# EAGLE board 0xD_protov1_v19 (EAGLE 9.7.0)
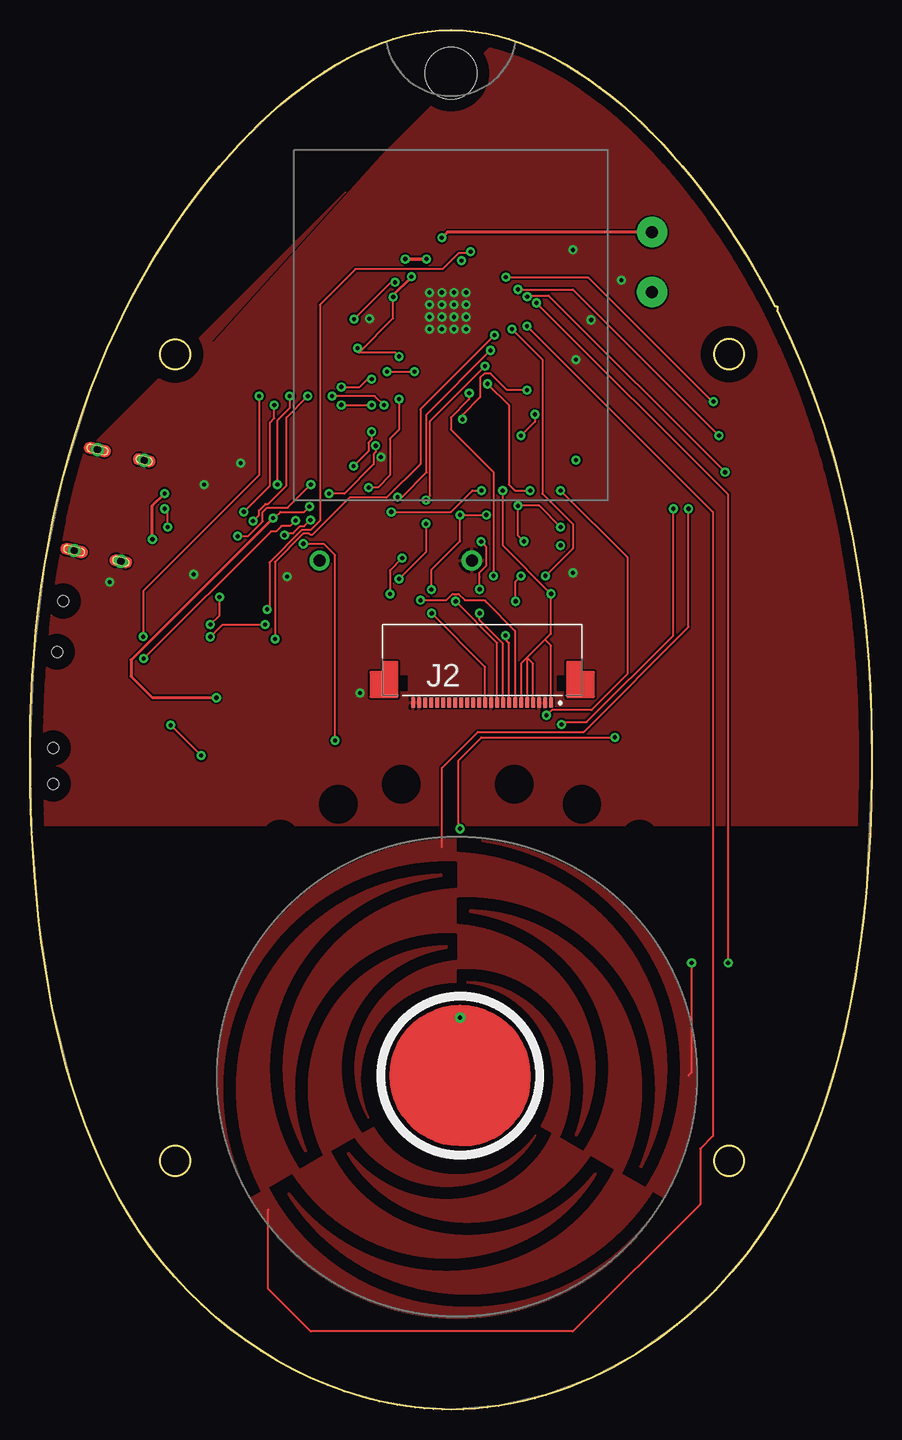
[diagram p0: board, top side]
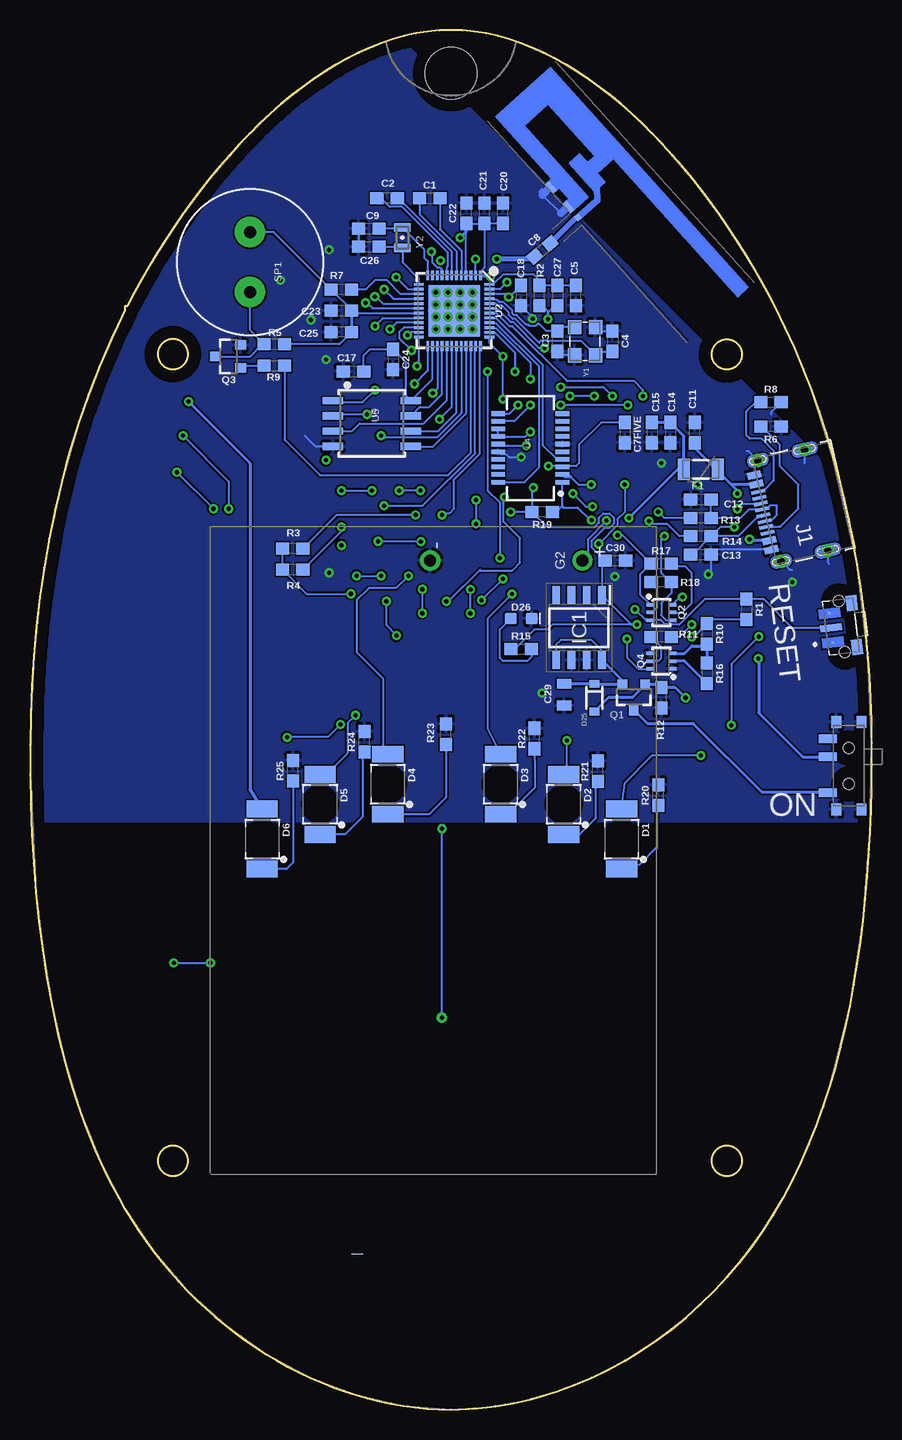
[diagram p1: board, bottom side, seen from below]

Size 70.21 x 115 mm. Coordinates in mm from the lower left corner, seen from the top.
Outline: 62.11,91.96 62.29,91.96 62.29,91.59 62.86,90.44 63.39,89.29 63.91,88.14 64.4,86.97 64.87,85.8 65.31,84.63 65.74,83.45 66.14,82.26 66.52,81.07 66.88,79.88 67.21,78.68 67.53,77.47 68.11,75.06 68.6,72.62 69.03,70.18 69.38,67.73 69.67,65.27 69.89,62.8 70.06,60.33 70.16,57.86 70.21,55.39 70.2,52.92 70.15,50.45 70.05,47.99 69.91,45.55 69.71,43.11 69.47,40.7 69.16,38.31 68.8,35.94 68.37,33.62 67.88,31.32 67.61,30.19 67.32,29.08 67.01,27.97 66.68,26.87 66.34,25.79 65.97,24.72 65.59,23.67 65.18,22.63 64.75,21.61 64.31,20.6 63.84,19.61 63.35,18.63 62.83,17.68 62.29,16.74 61.73,15.81 61.14,14.9 60.53,14.02 59.89,13.15 59.22,12.31 58.53,11.49 57.82,10.69 57.09,9.91 56.34,9.16 55.56,8.43 54.76,7.73 53.95,7.05 53.12,6.4 52.27,5.78 51.4,5.19 50.52,4.62 49.63,4.09 48.72,3.58 47.8,3.11 46.87,2.66 45.93,2.25 44.97,1.87 44.01,1.52 43.04,1.21 42.07,0.93 41.08,0.69 40.1,0.48 39.1,0.31 38.11,0.17 37.11,0.08 36.11,0.02 35.11,0 34.36,0.01 33.61,0.04 32.86,0.1 32.11,0.17 31.36,0.27 30.62,0.39 29.88,0.53 29.14,0.69 28.4,0.86 27.67,1.06 26.21,1.52 24.78,2.05 23.36,2.65 21.97,3.33 20.6,4.07 19.27,4.89 17.97,5.76 16.7,6.7 15.48,7.7 14.29,8.76 13.15,9.88 12.06,11.05 11.02,12.27 10.03,13.54 9.1,14.86 8.23,16.22 7.41,17.63 6.64,19.08 5.92,20.57 5.25,22.09 4.63,23.65 4.05,25.25 3.53,26.88 3.04,28.53 2.6,30.22 2.19,31.93 1.83,33.66 1.5,35.41 1.21,37.19 0.96,38.98 0.74,40.79 0.55,42.61 0.39,44.44 0.25,46.28 0.15,48.13 0.07,49.98 0.02,51.84 0,53.7 0,55.57 0.04,57.43 0.1,59.3 0.2,61.16 0.33,63.02 0.5,64.88 0.7,66.74 0.94,68.6 1.22,70.45 1.54,72.29 1.9,74.13 2.31,75.96 2.76,77.78 3.25,79.59 3.79,81.4 4.38,83.19 5.02,84.97 5.71,86.74 6.46,88.49 7.25,90.23 8.11,91.96 8.7,93.09 9.32,94.21 9.96,95.33 10.62,96.43 11.3,97.51 12.01,98.58 12.73,99.64 13.48,100.67 14.24,101.68 15.02,102.67 15.82,103.64 16.63,104.57 17.46,105.48 18.3,106.36 19.16,107.21 20.03,108.02 20.91,108.8 21.81,109.54 22.71,110.24 23.63,110.9 24.55,111.52 25.48,112.1 26.42,112.62 27.37,113.1 28.32,113.53 29.28,113.91 30.25,114.24 31.21,114.51 32.18,114.72 33.16,114.87 34.13,114.97 35.11,115 36.08,114.97 37.05,114.87 38.03,114.72 39,114.51 39.96,114.24 40.93,113.91 41.89,113.53 42.84,113.1 43.79,112.62 44.73,112.1 45.66,111.52 46.58,110.9 47.5,110.24 48.4,109.54 49.3,108.8 50.18,108.02 51.05,107.21 51.91,106.36 52.75,105.48 53.58,104.57 54.39,103.64 55.19,102.67 55.97,101.68 56.73,100.67 57.48,99.64 58.2,98.58 58.91,97.51 59.59,96.43 60.25,95.33 60.89,94.21 61.51,93.09 62.11,91.96
Outline: circle at 12.11,20.74 radius 1.25
Outline: circle at 12.11,87.96 radius 1.25
Outline: circle at 58.29,20.74 radius 1.25
Outline: circle at 58.29,87.98 radius 1.25
Copper layers (1*16): Top 0.035mm / dielectric 1.5mm / Bottom 0.035mm
Design rules "Fusion Electronics Design Rules": minimum track width 6mil, minimum drill 0.35mm, track to track 6mil, track to pad 6mil, pad to pad 6mil, via to via 6mil, smd to smd 6mil, copper to edge 40mil, drill to drill 6mil, minimum pad ring 10mil, minimum via ring 8mil, stop-mask expansion 4mil, vias tented up to drill 0mil, thermal gap 10mil
Holes 4.32 mm at 35.11,111.41

## Footprints (pad centres in the part's own frame; a part is rotated, then mirrored left to right if it is on the bottom)
BUTTON_PASSIVE_12MM = drill 0.356: BUTTON 0,4.826
0603 = smd 1.1 x 1: 1 -0.85,0; 2 0.85,0
0805 = smd 0.8 x 1.2: 1 -0.9,0; 2 0.9,0
XZ-PLCC2-REV-HOLE = smd 1.4 x 2.6: ANODE -2.5,0; CATHODE 2.5,0
SOD-323 = smd 0.63 x 0.83: A 1.15,0; C -1.15,0
LED-0603@1 = smd 1 x 1: A 0,-0.877; C 0,0.877
TRACE_ANTENNA_2.4GHZ_25.7MM_TUNED = smd 0.46 x 0.46: ANT 0,0.23 | smd 1 x 0.46: GND -1.18,0.23; GND2 -3.38,0.23
PTC-1206 = smd 1 x 1.8: 1 -1.4,0; 2 1.4,0
KEYSTONE_2479 = drill 1 pad 1.676: + 51.15,6.15; - 51.15,18.85
SOIC127P600X170-8N = smd 1.5 x 0.65: 1 -2.7,1.905; 2 -2.7,0.635; 3 -2.7,-0.635; 4 -2.7,-1.905; 5 2.7,-1.905; 6 2.7,-0.635; 7 2.7,0.635; 8 2.7,1.905
MOLEX_2171790001 = smd 0.59 x 1.15: A1B12 -3.2,3.425; A4B9 -2.4,3.425; B1A12 3.2,3.425; B4A9 2.4,3.425 | smd 0.298 x 1.15: A5 -1.25,3.425; A6 -0.25,3.425; A7 0.25,3.425; A8 1.25,3.425; B5 1.75,3.425; B6 0.75,3.425; B7 -0.75,3.425; B8 -1.75,3.425 | drill 0.6 pad 1: SH1 -4.32,-1.15; SH2 4.32,-1.15; SH3 -4.32,2.85; SH4 4.32,2.85
MOLEX_52435-2471 = smd 0.3 x 0.8: 1 -5.75,0; 2 -5.25,0; 3 -4.75,0; 4 -4.25,0; 5 -3.75,0; 6 -3.25,0; 7 -2.75,0; 8 -2.25,0; 9 -1.75,0; 10 -1.25,0; 11 -0.75,0; 12 -0.25,0; 13 0.25,0; 14 0.75,0; 15 1.25,0; 16 1.75,0; 17 2.25,0; 18 2.75,0; 19 3.25,0; 20 3.75,0; 21 4.25,0; 22 4.75,0; 23 5.25,0; 24 5.75,0
CUS-12_SPDT = smd 0.7 x 1.5: P$1 -2.25,1.75; P$2 0.75,1.75; P$3 2.25,1.75 | smd 1 x 0.8: P$4 -3.65,1.05; P$5 -3.65,-1.05; P$6 3.65,1.05; P$7 3.65,-1.05 | hole 0.9: -1.5,0; 1.5,0
SOT23-3@1 = smd 0.8 x 0.9: 1 -0.95,-1; 2 0.95,-1; 3 0,1.1
SC70-6 = smd 0.3 x 0.66: 1 -0.65,-0.92; 2 0,-0.92; 3 0.65,-0.92; 4 0.65,0.92; 5 0,0.92; 6 -0.65,0.92
SOT23-3 = smd 0.8 x 0.9: 1 -0.95,-1; 2 0.95,-1; 3 0,1.1
SW_TL3340AF160QG = smd 0.2 x 0.2: 1 -1.225,0.9; 3 1.225,0.9 | smd 0.6 x 1.8: 2 0,0.9 | smd 1.3 x 0.9: S1 -1.85,-1.05; S2 1.85,-1.05 | hole 0.9: 2.125,0; -2.125,0
PS12 = drill 1 pad 2.54: P$1 -2.5,0; P$2 2.5,0
QFN48-0.4MM = smd 0.8 x 0.23: 1 -2.95,2.2; 2 -2.95,1.8; 3 -2.95,1.4; 4 -2.95,1; 5 -2.95,0.6; 6 -2.95,0.2; 7 -2.95,-0.2; 8 -2.95,-0.6; 9 -2.95,-1; 10 -2.95,-1.4; 11 -2.95,-1.8; 12 -2.95,-2.2; 25 2.95,-2.2; 26 2.95,-1.8; 27 2.95,-1.4; 28 2.95,-1; 29 2.95,-0.6; 30 2.95,-0.2; 31 2.95,0.2; 32 2.95,0.6; 33 2.95,1; 34 2.95,1.4; 35 2.95,1.8; 36 2.95,2.2 | smd 0.23 x 0.8: 13 -2.2,-2.95; 14 -1.8,-2.95; 15 -1.4,-2.95; 16 -1,-2.95; 17 -0.6,-2.95; 18 -0.2,-2.95; 19 0.2,-2.95; 20 0.6,-2.95; 21 1,-2.95; 22 1.4,-2.95; 23 1.8,-2.95; 24 2.2,-2.95; 37 2.2,2.95; 38 1.8,2.95; 39 1.4,2.95; 40 1,2.95; 41 0.6,2.95; 42 0.2,2.95; 43 -0.2,2.95; 44 -0.6,2.95; 45 -1,2.95; 46 -1.4,2.95; 47 -1.8,2.95; 48 -2.2,2.95 | smd 4.3 x 4.3: EP 0,0
SSOP20_L = smd 0.381 x 1.143: 1 -2.857,-2.68; 2 -2.223,-2.68; 3 -1.587,-2.68; 4 -0.953,-2.68; 5 -0.318,-2.68; 6 0.318,-2.68; 7 0.953,-2.68; 8 1.587,-2.68; 9 2.223,-2.68; 10 2.857,-2.68; 11 2.857,2.68; 12 2.223,2.68; 13 1.587,2.68; 14 0.953,2.68; 15 0.318,2.68; 16 -0.318,2.68; 17 -0.953,2.68; 18 -1.587,2.68; 19 -2.223,2.68; 20 -2.857,2.68
SOIC-8 = smd 0.61 x 1.702: 1 -1.905,-3.251; 2 -0.635,-3.251; 3 0.635,-3.251; 4 1.905,-3.251; 5 1.905,3.251; 6 0.635,3.251; 7 -0.635,3.251; 8 -1.905,3.251
CRYSTAL-SMD-3.2X2.5 = smd 1.2 x 1.1: 1 -1.175,-0.875; 2 1.175,-0.875; 3 1.175,0.875; 4 -1.175,0.875
FC-12M = smd 0.7 x 1.4: 1 -0.85,0; 2 0.85,0

## Placement (x,y rotation side)
B1  [BUTTON_PASSIVE_12MM]  35.86,27.84 0 top
C1  270pF  [0603]  36.88,100.99 0 bottom
C2  270pF  [0603]  40.43,100.99 180 bottom
C3  10pF  [0603]  26.21,89.05 90 bottom
C4  10pF  [0603]  21.64,89.05 270 bottom
C5  10nF  [0603]  24.69,92.86 90 bottom
C7FIVE  0.1uF  [0603]  20.62,81.43 270 bottom
C8  5.6pF  [0603]  27.48,96.67 40 bottom
C9  15pF  [0603]  41.96,98.45 0 bottom
C11  0.1uF  [0603]  14.78,81.43 90 bottom
C12  47pF  [0603]  14.27,75.85 180 bottom
C13  47pF  [0603]  14.27,71.27 0 bottom
C14  0.1uF  [0603]  16.81,81.43 270 bottom
C15  4.7uF  [0603]  18.34,81.43 270 bottom
C17  0.1uF  [0603]  43.23,86.51 180 bottom
C18  100pF  [0603]  29.26,92.86 270 bottom
C20  0.1uF  [0603]  30.78,99.72 90 bottom
C21  0.1uF  [0603]  32.31,99.72 90 bottom
C22  10uF  [0603]  33.83,99.72 90 bottom
C23  0.1uF  [0603]  44.24,91.59 180 bottom
C24  1.0uF  [0603]  39.93,87.53 270 bottom
C25  0.1uF  [0603]  44.24,89.82 180 bottom
C26  15pF  [0603]  41.96,96.93 0 bottom
C27  3.0nF  [0603]  26.21,92.86 270 bottom
C29  1.0uF  [0805]  25.67,59.59 270 bottom
C30  2.2uF  [0603]  21.4,70.77 0 bottom
D1  XZDGK45WT-9-GREEN-REV  [XZ-PLCC2-REV-HOLE]  20.88,47.55 270 bottom
D2  XZDGK45WT-9-GREEN-REV  [XZ-PLCC2-REV-HOLE]  25.7,50.45 270 bottom
D3  XZDGK45WT-9-GREEN-REV  [XZ-PLCC2-REV-HOLE]  30.96,52.12 270 bottom
D4  XZDGK45WT-9-GREEN-REV  [XZ-PLCC2-REV-HOLE]  40.38,52.12 270 bottom
D5  XZDGK45WT-9-GREEN-REV  [XZ-PLCC2-REV-HOLE]  46.02,50.45 270 bottom
D6  XZDGK45WT-9-GREEN-REV  [XZ-PLCC2-REV-HOLE]  50.85,47.55 270 bottom
D25  BAT20J  [SOD-323]  23.15,59.34 270 bottom
D26  RED  [LED-0603@1]  29.26,65.94 270 bottom
E1  ANTENNA  [TRACE_ANTENNA_2.4GHZ_25.7MM_TUNED]  24.69,99.21 312 bottom
F1  500mA  [PTC-1206]  14.27,78.39 180 bottom
G2  KEYSTONE_2479  [KEYSTONE_2479]  17.98,19.62 90 bottom
IC1  AP2112M-3.3TRG1  [SOIC127P600X170-8N]  24.43,65.18 270 bottom
J1  2171790001  [MOLEX_2171790001]  5.77,75.56 103 bottom
J2  52435-2471  [MOLEX_52435-2471]  37.7,58.94 180 top
ON  CUS-12B  [CUS-12_SPDT]  1.93,53.66 90 bottom
Q1  2.5A/30V  [SOT23-3@1]  19.86,59.42 180 bottom
Q2  MBT3904DW1T1  [SC70-6]  17.57,66.45 270 bottom
Q3  600mA/40V  [SOT23-3]  53.64,87.78 90 bottom
Q4  MBT3904DW1T1  [SC70-6]  17.57,62.38 90 bottom
R1  10k  [0603]  10.46,66.7 270 bottom
R2  20k  [0603]  27.73,92.86 90 bottom
R3  10k  [0603]  48.31,71.78 180 bottom
R4  10k  [0603]  48.31,70 180 bottom
R5  1k  [0603]  49.83,88.8 180 bottom
R6  5.1k  [0603]  8.43,81.94 180 bottom
R7  10k  [0603]  44.24,93.37 180 bottom
R8  5.1k  [0603]  8.43,83.97 0 bottom
R9  1k  [0603]  49.83,87.02 0 bottom
R10  10k  [0603]  13.76,64.67 270 bottom
R11  1k  [0603]  17.57,64.42 180 bottom
R12  10k  [0603]  17.57,59.34 90 bottom
R13  27  [0603]  14.27,74.32 180 bottom
R14  27  [0603]  14.27,72.8 180 bottom
R15  1K  [0603]  29.26,63.4 0 bottom
R16  1k  [0603]  13.76,61.37 270 bottom
R17  10k  [0603]  17.57,70.51 0 bottom
R18  10k  [0603]  17.57,68.99 180 bottom
R19  10k  [0603]  27.5,74.83 180 bottom
R20  330  [0603]  17.83,51.21 90 bottom
R21  330  [0603]  22.87,53.21 90 bottom
R22  330  [0603]  28.13,55.94 90 bottom
R23  330  [0603]  35.54,56.29 90 bottom
R24  330  [0603]  42.33,55.66 90 bottom
R25  330  [0603]  48.28,53.25 90 bottom
RESET  TL3340AF160QG  [SW_TL3340AF160QG]  2.51,65.27 97 bottom
SP1  SPEAKER/PS12  [PS12]  51.86,95.66 270 bottom
U2  ESP3212  [QFN48-0.4MM]  34.85,91.59 270 bottom
U4  FT231XS  [SSOP20_L]  28.5,80.16 90 bottom
U5  W25Q32FVSS  [SOIC-8]  41.7,82.2 270 bottom
Y1  26MHz  [CRYSTAL-SMD-3.2X2.5]  23.92,89.05 270 bottom
Y2  32.768kHz  [FC-12M]  39.16,97.69 270 bottom

## Library data of the parts
B1 = PatternAgents-TouchWidgets
C1 C2 = esp32-thing-temp; PROD_ID: CAP-13339
C3 C4 = SparkFun-Capacitors; PROD_ID: CAP-11812
C5 = SparkFun-Capacitors; PROD_ID: CAP-00867
C7FIVE C11 C14 C15 C17 C20 C21 C23 C25 = SparkFun-Capacitors; PROD_ID: CAP-00810
C8 = esp32-thing-temp; PROD_ID: CAP-12456
C9 C26 = SparkFun-Capacitors; PROD_ID: CAP-07881
C12 C13 = SparkFun-Capacitors; PROD_ID: CAP-08913
C18 = SparkFun-Capacitors; PROD_ID: CAP-07883
C22 = SparkFun-Capacitors; PROD_ID: CAP-11015
C24 = SparkFun-Capacitors; PROD_ID: CAP-00868
C27 = esp32-thing-temp; PROD_ID: CAP-13515
C29 = SparkFun-Capacitors; PROD_ID: CAP-11625
C30 = SparkFun-Capacitors; PROD_ID: CAP-07888
D1-D6 = PatternAgents-SunLED
D25 = SparkFun-DiscreteSemi; PROD_ID: DIO-11623
D26 = SparkFun-LED; PROD_ID: DIO-00819
E1 = esp32-thing-temp
F1 = SparkFun-PowerIC; PROD_ID: RES-11150
G2 = keystone
IC1 = AP2112M-3.3TRG1; ARROW_PART_NUMBER: AP2112M-3.3TRG1; ARROW_PRICE-STOCK: https://www.arrow.com/en/products/ap2112m-3.3trg1/diodes-incorporated?region=nac; DESCRIPTION: LDO Voltage Regulators LDO CMOS HiCurr; HEIGHT: 1.7mm; MANUFACTURER_NAME: Diodes Inc.; MANUFACTURER_PART_NUMBER: AP2112M-3.3TRG1; MOUSER_PART_NUMBER: 621-AP2112M-3.3TRG1; MOUSER_PRICE-STOCK: https://www.mouser.co.uk/ProductDetail/Diodes-Incorporated/AP2112M-33TRG1?qs=5V6w%252Be2aIqa1YM8VADFBsQ%3D%3D
J1 = 2171790001 - Molex USB C Female Connector; AVAILABILITY: In Stock; CHECK_PRICES: https://www.snapeda.com/parts/2171790001/Molex/view-part/?ref=eda; DESCRIPTION: Universal Serial Bus (USB) Shielded I/O Receptacle, Type C, Right-Angle, Surface Mount, Top Mount, Single Row, 16 Circuits, Gold (Au) Plating; MF: Molex; MP: 2171790001; PACKAGE: None; PRICE: None; SNAPEDA_LINK: https://www.snapeda.com/parts/2171790001/Molex/view-part/?ref=snap
J2 = 52435-2471; AVAILABILITY: In Stock; CHECK_PRICES: https://www.snapeda.com/parts/52435-2471/Molex/view-part/?ref=eda; DESCRIPTION: 52435 Series 0.5mm Pitch 24 Way Right Angle FPC Connector, ZIF Top Contact | Molex Incorporated 52435-2471; MF: Molex; MP: 52435-2471; PACKAGE: None; PRICE: None; SNAPEDA_LINK: https://www.snapeda.com/parts/52435-2471/Molex/view-part/?ref=snap
ON = IDEO-Switches
Q1 = SparkFun-DiscreteSemi; PROD_ID: TRANS-11308
Q2 Q4 = esp32-thing-temp; PROD_ID: TRANS-13337
Q3 = SparkFun-DiscreteSemi; PROD_ID: TRANS-08049
R1 R3-R12 R16-R25 = SparkFun-Resistors; PROD_ID: RES-00824
R2 = SparkFun-Resistors; PROD_ID: RES-09383
R13 R14 = SparkFun-Resistors; PROD_ID: RES-09334
R15 = SparkFun-Resistors; PROD_ID: RES-07856
RESET = TL3340AF160QG; AVAILABILITY: In Stock; DESCRIPTION: Tactile Switch SPST-NO Side Actuated Surface Mount, Right Angle; MF: E-Switch; MP: TL3340AF160QG; PACKAGE: None; PRICE: None; PURCHASE-URL: https://pricing.snapeda.com/search/part/TL3340AF160QG/?ref=eda
SP1 = adafruit
U2 = esp32-thing-temp; PROD_ID: IC-13338
U4 = SparkFun-DigitalIC; PROD_ID: IC-11524
U5 = SparkFun-DigitalIC; PROD_ID: IC-13229
Y1 = things; PROD_ID: XTAL-12454
Y2 = crystal

## Nets
3.3V: C18.1 C20.1 C21.1 C22.1 C23.1 C25.1 C30.1 IC1.1 J2.1 J2.4 J2.5 J2.6 R1.2 R3.2 R4.2 R5.1 R7.2 R10.1 R15.1 R19.2 SP1.P$1 U2.1 U2.3 U2.4 U2.19 U2.37 U2.43 U2.46
3.3V_F: C7FIVE.1 U4.3 U4.13 U4.14
26M_N: C4.2 U2.44 Y1.3
26M_P: C3.2 U2.45 Y1.1
32K_XN: C26.2 U2.13 Y2.2
32K_XP: C9.2 U2.12 Y2.1
36: C1.2 U2.5
37: C1.1 U2.6
38: C2.1 U2.7
39: C2.2 U2.8
BUZZER_OUT: R9.2 U2.34
CAP_10N: C5.2 C27.1 R2.2 U2.48
CHIP_PU: Q2.3 R1.1 RESET.2 U2.9
D+: C13.1 J1.A6 J1.B6 R14.1
D-: C12.1 J1.A7 J1.B7 R13.1
DST: R7.1 U2.15
DTR: Q2.1 R17.1 R19.1 U4.1
FLASH_SCK: U2.31 U5.6
FLASH_SCS: U2.30 U5.1
FLASH_SDI: U2.33 U5.5
FLASH_SDO: U2.32 U5.2
FLASH_SHD: U2.28 U5.7
FLASH_SWP: U2.29 U5.3
FLASH_VDD: C17.1 C24.1 U2.26 U5.8
GND: C3.1 C4.1 C5.1 C7FIVE.2 C9.1 C11.2 C12.2 C13.2 C14.2 C15.2 C17.2 C18.2 C20.2 C21.2 C22.2 C23.2 C24.2 C25.2 C26.1 C29.2 C30.2 D26.C E1.GND E1.GND2 G2.- IC1.6 IC1.7 J1.A1B12 J1.B1A12 J1.SH1 J1.SH2 J1.SH3 J1.SH4 J2.2 J2.3 J2.11 J2.23 J2.24 ON.P$4 ON.P$5 ON.P$6 ON.P$7 Q3.2 Q4.1 Q4.4 R6.1 R8.2 R12.1 R20.2 R21.2 R22.2 R23.2 R24.2 R25.2 RESET.1 RESET.3 U2.EP U4.6 U4.16 U5.4 Y1.2 Y1.4
GPIO-0: Q4.6 U2.23
LCD_CLK: J2.9 R4.1 U2.35
LCD_CS: J2.8 U2.21
LCD_DC: J2.10 U2.22
LCD_RST: J2.7 U2.24
LCD_SDATA: J2.12 R3.1 U2.36
LED1: D1.ANODE U2.42
LED2: D2.ANODE U2.39
LED3: D3.ANODE U2.38
LED4: D4.ANODE U2.27
LED5: D5.ANODE U2.25
LED6: D6.ANODE U2.14
LNA_IN: C8.1 U2.2
N$1: D1.CATHODE R20.1
N$2: D2.CATHODE R21.1
N$3: Q3.3 R5.2 SP1.P$2
N$4: C27.2 R2.1 U2.47
N$5: J1.A5 R6.2
N$6: D3.CATHODE R22.1
N$7: R13.2 U4.12
N$8: R14.2 U4.11
N$9: Q4.2 R16.2
N$10: Q2.5 R17.2
N$11: J1.B5 R8.1
N$12: Q2.2 R18.2
N$13: Q4.3 R10.2 R16.1
N$14: Q4.5 R11.2
N$15: Q2.6 R11.1
N$16: G2.+ ON.P$2
N$17: D4.CATHODE R23.1
N$18: D26.A R15.2
N$19: D5.CATHODE R24.1
N$20: D6.CATHODE R25.1
N$26: Q3.1 R9.1
RTS: Q2.4 R18.1 U4.2
T_Q1: U2.20
T_Q2: U2.18
T_Q3: U2.17
T_Q4: B1.BUTTON U2.16
TRACE_ANT: C8.2 E1.ANT
U0RXD: U2.40 U4.20
U0TXD: U2.41 U4.4
V_BATT: ON.P$1 Q1.3
V_USB: C14.1 C15.1 D25.A F1.2 Q1.1 R12.2 U4.15
VIN: C29.1 D25.C IC1.5 IC1.8 Q1.2
VUSB-RAW: C11.1 F1.1 J1.A4B9 J1.B4A9

## Tracks (layer width: path | path; a pad name or v marks a point on that pad's centre or on a via)
3.3V  (via drill 0.35)
  Top 0.152: v30.78,87.78 30.47,88.1 27.42,88.1 | v19.61,65.43 16.05,65.43 v15.03,64.42 | 42.95,64.17 43.45,64.67 v43.45,68 39.42,72.04 v39.42,76.61 | 27.42,88.1 27.42,88.39 v27.32,88.49 | 27.42,88.1 30.29,90.97 v30.29,92.74 | v30.78,84.23 30.78,81.69 30.02,80.93 30.02,77.88 29,76.86 v28.24,76.86 | v37.64,76.61 36.88,76.61 35.1,74.83 v30.12,74.83 | J2.1 43.45,63.67 42.95,64.17 | 42.95,64.17 41.45,62.67 | 41.45,62.67 J2.5 | J2.6 40.95,62.17 41.45,62.67 | J2.4 41.95,62.17 41.45,62.67
  Top 0.254: SP1.P$1 34.81,98.16 v34.34,97.69 | v30.29,92.74 30.29,92.88 31.8,94.39 v31.8,94.44
  Bottom 0.152: C21.1 32.31,95.17 32.65,94.83 U2.1 32.54,94.44 v31.8,94.44 | C20.1 C21.1 | C21.1 C22.1 33.85,98.86 33.85,98.71 U2.4 U2.3 | 43.48,89.9 C25.1 44.41,88.8 R5.1 | U2.19 43.19,91.39 C23.1 43.39,91.67 R7.2 49.88,98.16 SP1.P$1 | 29.98,92.99 U2.46 | C18.1 29.98,92.99 | R1.2 13.43,65.85 R10.1 14.87,64.42 v15.03,64.42 | U2.43 31.84,91.74 31.4,91.74 31.36,91.7 31.18,91.7 30.1,90.63 29.89,90.63 27.75,88.49 v27.32,88.49 | U2.37 31.9,88.9 v30.78,87.78 v30.78,84.23 | R3.2 R4.2 47.15,68 v43.45,68 | 29.98,92.99 30.23,92.74 v30.29,92.74 | v28.24,76.86 28.35,76.76 R19.2 | v37.64,76.61 v39.42,76.61 | R19.2 v30.12,74.83 | R19.2 27.06,73.54 23.13,73.54 22.75,73.92 22.75,74.35 22.4,74.7 21.89,74.7 21.54,74.35 21.54,73.85 21.89,73.49 22.32,73.49 23.4,72.41 23.4,71.91 C30.1 22.53,70.49 IC1.1 20.08,65.43 v19.61,65.43 26.65,65.43 27.05,65.03 28.15,65.03 29.78,63.4 R15.1
  Bottom 0.254: C23.1 43.39,89.99 43.48,89.9 | v34.34,97.69 33.85,98.18 33.85,98.71
3.3V_F  (via drill 0.35)
  Top 0.152: v28.5,81.5 28.5,80.86 28.22,80.59 28.22,79.89 v26.97,78.64
  Bottom 0.152: C7FIVE.1 22.57,82.28 24.43,80.42 24.43,78.89 24.69,78.64 25.75,78.64 U4.3 25.88,78.64 v26.97,78.64 | U4.13 U4.14 28.88,81.12 v28.5,81.5
26M_N
  Bottom 0.152: C4.2 22.72,88.2 Y1.3 24.22,89.05 27.03,89.05 27.07,89.09 27.57,89.09 27.75,88.92 29.76,90.93 29.98,90.93 30.29,91.24 30.29,91.46 30.84,92 31.2,92 31.2,92.01 31.38,92.19 U2.44
26M_P
  Bottom 0.152: Y1.1 25.88,90.23 C3.2 27.14,89.9 27.77,90.54 27.83,90.54 28.05,90.33 28.55,90.33 28.65,90.42 28.8,90.42 28.92,90.54 28.94,90.54 29.64,91.23 29.85,91.23 29.99,91.37 29.99,91.58 30.71,92.31 31.06,92.31 31.26,92.5 31.36,92.5 31.4,92.54 31.84,92.54 U2.45
32K_XN
  Bottom 0.152: U2.13 37.8,94.29 39.16,95.66 Y2.2 39.25,96.93 C26.2
32K_XP
  Bottom 0.152: 39.12,98.5 Y2.1 | C9.2 39.16,98.45 39.12,98.5 | U2.12 37.05,95.73 37.35,96.04 37.35,96.73 39.12,98.5
36
  Bottom 0.152: C1.2 36.03,98.39 34.25,96.6 U2.5
37
  Bottom 0.152: C1.1 37.73,99.66 34.65,96.57 U2.6
38
  Bottom 0.152: C2.1 39.49,100.99 35.05,96.54 U2.7
39
  Bottom 0.152: U2.8 35.45,95.23 35.36,95.31 35.36,96.43 39.2,100.26 40.23,100.26 40.96,100.99 C2.2
BUZZER_OUT
  Bottom 0.152: U2.34 33.45,79.79 35.35,77.88 46.02,77.88 48.98,80.84 R9.2
CAP_10N
  Bottom 0.152: R2.2 27.73,93.76 | R2.2 C27.1 C5.2 | R2.2 27.73,94.13 28.24,94.64 30.74,94.64 31.58,93.79 U2.48
CHIP_PU  (via drill 0.35)
  Top 0.152: v19.76,66.7 19.96,66.9 19.96,70.62 22.66,73.32 23.41,73.32 24.18,74.09 24.18,92.1 27.14,95.06 34.4,95.06 35.72,96.39 36.62,96.39 v36.75,96.52
  Bottom 0.152: RESET.2 6.64,65.16 9.03,67.55 R1.1 13.93,67.55 16.06,65.42 17.23,65.42 17.61,65.8 Q2.3 18.86,65.8 v19.76,66.7 | v36.75,96.52 36.67,96.44 36.67,95.62 36.22,95.17 36.04,95.17 35.85,94.98 U2.9
D+  (via drill 0.35)
  Top 0.152: v11.22,75.08 11.48,74.83 v11.48,73.56
  Bottom 0.152: J1.A6 9.22,74.38 9.57,74.38 11.15,72.8 R14.1 | v11.22,75.08 10.82,75.49 9.85,75.49 9.82,75.52 J1.B6 | v11.48,73.56 12.66,73.56 R14.1 | R14.1 14.95,71.27 C13.1
D-
  Bottom 0.152: J1.B7 8.44,74.06 7.92,74.58 7.92,75.34 8.5,75.34 8.65,75.19 9,75.19 J1.A7 9.71,75.03 9.74,75 10.29,75 10.97,74.32 R13.1 C12.1
DST
  Bottom 0.152: 43.02,92.99 R7.1 42.21,93.37 41.45,94.13 40.43,94.13 39.29,92.99 U2.15
DTR  (via drill 0.35)
  Top 0.152: v21.21,72.88 21.38,73.05 21.96,73.05 22.53,73.63 22.86,73.63 v23.38,74.15
  Bottom 0.152: Q2.1 19.35,67.96 19.35,69.58 R17.1 20.79,72.88 v21.21,72.88 | 25.82,75.34 U4.1 | 25.82,75.34 25.82,75.2 24.55,75.2 23.5,74.15 v23.38,74.15 | 25.82,75.34 26.32,74.83 R19.1
FLASH_SCK
  Bottom 0.152: U5.6 36.18,81.56 34.65,83.1 U2.31
FLASH_SCS  (via drill 0.35)
  Top 0.152: v41.45,84.99 39.77,84.99 38.4,86.36 37.9,86.36 37.54,86 37.54,84.38 36.06,82.9 v36.06,82.55
  Bottom 0.152: v41.45,84.99 42.47,83.97 44.83,83.97 U5.1 | U2.30 35.05,83.56 v36.06,82.55
FLASH_SDI
  Bottom 0.152: U2.33 33.83,88.63 33.83,83.05 36.59,80.29 U5.5
FLASH_SDO  (via drill 0.35)
  Top 0.152: v42.11,82.96 42.11,82.35 v40.94,81.18
  Bottom 0.152: U5.2 44.83,82.96 v42.11,82.96 | v40.94,81.18 40.79,81.03 36.29,81.03 34.25,83.07 U2.32
FLASH_SHD
  Bottom 0.152: U5.7 37.72,83.57 36.93,83.57 35.85,84.66 U2.28
FLASH_SWP
  Bottom 0.152: U2.29 35.45,84.14 37.39,82.2 42.72,82.2 43.35,81.56 U5.3
FLASH_VDD
  Bottom 0.152: C17.1 42.38,87.87 41.87,88.38 C24.1 38.91,87.36 38.91,84.56 U5.8 36.65,85.91 U2.26
GND  (via drill 0.35)
  Top 0.152: 28.24,91.09 28.3,91.03 v28.3,90.93 | v13.64,69.62 13.76,69.75
  Bottom 0.152: C9.1 C26.1 | Y1.4 22.72,89.9 C4.1 | C3.1 25.88,87.88 Y1.2 | J1.A1B12 13.03,71.67 C13.2 13.42,69.58 13.51,69.5 v13.64,69.62 | 25.96,99.72 27.48,101.25 27.73,101.5 27.48,101.75 | C18.2 28.3,91.05 v28.3,90.93 | U4.16 30.96,79.63 30.51,79.63 30.28,79.4 v29.26,79.4 | R8.2 8.43,83.12 8.43,82.96 | U5.4 46.4,80.29 47.29,81.18 | J1.SH1 3.68,70.59 3.6,70.51 | J1.SH3 6.87,70 6.65,70 | 10.46,79.91 10.3,79.91 J1.SH4 | J1.SH2 5.64,80.01 5.64,78.89 | U2.EP v34.34,92.1
  Bottom 0.61: E1.GND2 26.85,101.88 27.48,101.25 | E1.GND 25.43,100.24 25.96,99.72
  other vias: 33.32,93.12 34.34,93.12 35.35,93.12 33.32,92.1 35.35,92.1 33.32,91.09 35.35,91.09 36.37,93.12 36.37,92.1 36.37,91.09 33.32,90.07 34.34,90.07 35.35,90.07 36.37,90.07 27.52,59.73 6.65,68.99 45.51,87.53 45.26,96.67 49.32,94.13 46.78,90.83 17.57,78.89 14.53,77.12 45.26,69.75 34.34,91.09 21.43,69.45
  pour Bottom: -1.91,49 72.36,49 72.36,86.74 46.73,112.36 41.46,116.39 -1.91,73.02
  pour Top: -2.16,48.74 72.62,48.74 72.62,85.97 41.93,116.66 41.48,116.66 -2.16,73.02
GPIO-0  (via drill 0.35)
  Top 0.152: v38.73,89.56 32.56,83.39 32.56,78.83 29.73,76 26.64,76 23.54,72.9 23.41,72.9 23.29,73.02 22.79,73.02 20.43,70.66 v20.43,64.23
  Bottom 0.152: U2.23 38.42,89.79 38.66,89.56 v38.73,89.56 | v20.43,64.23 20.43,62.7 19.46,61.73 Q4.6
LCD_CLK  (via drill 0.35)
  Top 0.152: v44.24,73.56 42.47,75.34 v40.69,75.34 40.69,72.87 v41.18,72.37 | v37.49,68.38 37.49,69.39 37.47,69.41 37.47,69.76 38.05,70.34 38.05,71.92 v37.62,72.35 | v37.49,66.38 37.49,65.81 39.45,63.84 J2.9
  Bottom 0.152: U2.35 33.1,88.59 33.1,79.7 37.46,75.34 v40.69,75.34 | R4.1 44.24,73.22 v44.24,73.56 | v37.49,66.38 v37.49,68.38 | v37.62,72.35 41.16,72.35 v41.18,72.37
LCD_CS  (via drill 0.35)
  Top 0.152: v40.18,90.07 42.72,87.53 42.72,76.35 45.26,73.81 45.26,71.78 v42.97,69.5 | J2.8 39.95,63.91 39.64,64.23 v39.64,64.52 | v40.49,67.38 40.49,69.02 40.95,69.48 v40.94,69.5
  Bottom 0.152: U2.21 39.66,90.59 v40.18,90.07 | v42.97,69.5 v40.94,69.5 | v40.49,67.38 40.49,65.38 v39.64,64.52
LCD_DC  (via drill 0.35)
  Top 0.152: v38.4,88.29 33.07,82.96 33.07,78.13 31.01,76.07 v30.66,76.07 | J2.10 38.95,63.91 v35.49,67.38
  Bottom 0.152: v38.4,88.29 39.42,89.31 39.42,89.82 39.04,90.19 U2.22 | v30.66,76.07 30.73,76 30.73,74.02 29.41,72.7 29.34,72.63 29.34,70.59 29.98,69.95 32.72,69.95 | 32.67,70 32.72,69.95 | 32.72,69.95 35.29,67.38 v35.49,67.38
LCD_RST  (via drill 0.35)
  Top 0.152: v37.94,86.97 33.37,82.4 33.37,76.18 v33.02,75.83 | v30.78,69.24 32.3,70.76 33.02,71.48 v33.02,73.84 | J2.7 40.45,64.91 38.05,67.32 38.04,67.32 37.89,67.46 36.26,67.46 35.74,67.98 35.24,67.98 34.72,67.46 v32.56,67.46
  Bottom 0.152: U2.24 37.8,88.54 37.79,88.54 37.79,87.12 v37.94,86.97 | v32.56,67.46 v30.78,69.24 | v33.02,75.83 v33.02,73.84
LCD_SDATA  (via drill 0.35)
  Top 0.152: v35.86,74.58 v38.05,74.58 | v33.46,68.35 33.49,68.38 33.49,70.02 35.86,72.39 v35.86,74.58 | J2.12 37.95,61.91 v33.49,66.38 | v35.86,74.58 v35.85,74.57
  Bottom 0.152: U2.36 32.7,88.59 32.7,79.67 34.85,77.52 34.85,75.08 35.23,74.7 35.74,74.7 v35.86,74.58 | R3.1 44.66,74.58 v38.05,74.58 | v33.49,66.38 33.49,68.32 v33.46,68.35
LED1  (via drill 0.35)
  Top 0.152: v19.1,84.48 19.1,77.88 9.45,68.23 v9.45,64.43 v9.44,64.42 | v11.73,57.05 v14.27,54.51
  Bottom 0.152: U2.42 31.3,91.39 30.23,90.32 30.02,90.32 25.45,85.75 19.86,85.75 19.1,84.99 v19.1,84.48 | v11.73,57.05 11.73,62.13 v9.44,64.42 | v14.27,54.51 18.34,54.51 20.62,52.22 D1.ANODE
LED2  (via drill 0.35)
  Top 0.152: v25.96,85.24 27.48,85.24 28.14,85.91 v28.5,85.91 | v21.64,84.48 21.64,83.47 20.62,82.45 v20.62,77.12 | v25.45,55.78 25.45,71.22 24.5,72.16 v22.79,72.16
  Bottom 0.152: U2.39 31.84,90.14 31.37,90.14 28.5,87.26 v28.5,85.91 | v25.96,85.24 22.4,85.24 v21.64,84.48 | v20.62,77.12 20.62,74.83 21.23,74.22 21.23,73.72 v22.79,72.16 | D2.ANODE 25.45,53.2 v25.45,55.78
LED3  (via drill 0.35)
  Top 0.152: v29.77,86.51 v32.05,86.51 | v31.04,70.97 30.02,69.95 v30.02,67.97
  Bottom 0.152: U2.38 31.84,89.74 31.4,89.74 29.77,88.1 v29.77,86.51 | v32.05,86.51 32.05,76.61 31.04,75.59 v31.04,70.97 | v30.02,67.97 32.05,65.94 32.05,56.76 D3.ANODE
LED4  (via drill 0.35)
  Top 0.152: v36.62,84.74 36.62,84.23 35.1,82.7 35.1,81.69 38.66,78.13 v38.66,69.5
  Bottom 0.152: U2.27 36.25,85.11 v36.62,84.74 | v38.66,69.5 39.67,68.48 41.96,68.48 42.97,67.46 42.97,63.15 40.76,60.94 40.76,55.01 D4.ANODE
LED5  (via drill 0.35)
  Top 0.152: v38.15,85.5 39.93,83.72 39.93,77.12 40.43,76.61 v41.7,76.61 | v44.24,76.61 49.8,71.05 49.8,61.3 46.81,58.31 43.51,58.31 v43.07,57.87
  Bottom 0.152: U2.25 37.05,86.6 v38.15,85.5 | v44.24,76.61 v41.7,76.61 | D5.ANODE 45.48,52.95 43.72,54.71 43.72,57.22 v43.07,57.87
LED6  (via drill 0.35)
  Top 0.152: v39.67,94.39 46.53,94.39 56.9,84.02 v56.99,84.02
  Bottom 0.152: U2.14 38.68,93.39 v39.67,94.39
  Bottom 0.254: D6.ANODE 51.86,51.71 51.86,78.89 v56.99,84.02
LNA_IN  (via drill 0.35)
  Top 0.305: v31.29,95.91 v33.07,95.91
  Bottom 0.152: U2.2 33.05,95.89 v33.07,95.91
  Bottom 0.406: v31.29,95.91 28.35,95.91 C8.1
N$1
  Bottom 0.152: R20.1 17.93,50.26 17.93,46.89 | 17.93,46.89 17.93,46.79 | 17.93,46.89 19.41,45.41 D1.CATHODE
N$2
  Bottom 0.152: R21.1 23.01,52.23 23.01,49.33 24.39,47.95 D2.CATHODE
N$3
  Bottom 0.152: Q3.3 51.86,87.78 50.85,88.8 R5.2 51.86,89.98 SP1.P$2
N$4  (via drill 0.35)
  Top 0.152: v27.03,90.89 30.02,93.88 30.36,93.88 v30.44,93.96
  Bottom 0.152: 27.73,92.06 R2.1 27.48,92.01 27.03,91.56 v27.03,90.89 27.03,91.45 26.46,92.01 C27.2 | U2.47 31.01,93.39 v30.44,93.96
N$5
  Bottom 0.152: J1.A5 8.28,73.57 8.25,73.6 7.63,73.6 6.14,75.08 6.14,77.12 7.67,78.64 7.67,80.42 9.19,81.94 R6.2
N$6
  Bottom 0.152: R22.1 28.13,54.14 28.09,54.1 28.09,51.87 29.47,50.49 D3.CATHODE
N$7  (via drill 0.35)
  Top 0.152: v28.5,83.72 25.98,83.72 v25.96,83.74 | v17.83,74.83 20.01,77.02 20.01,82.27 20.37,82.63 v20.37,83.72
  Bottom 0.152: U4.12 29.83,82.39 v28.5,83.72 | v25.96,83.74 25.93,83.72 v20.37,83.72 | v17.83,74.83 17.32,74.32 R13.2
N$8  (via drill 0.35)
  Top 0.152: v29.51,83.72 28.75,84.48 v25.19,84.48 | v23.16,84.48 21.38,82.7 21.38,77.02 19.85,75.49 19.64,75.49 19.1,74.95 19.1,74.58 v18.59,74.07
  Bottom 0.152: U4.11 30.21,83.02 v29.51,83.72 | v23.16,84.48 v25.19,84.48 | v18.59,74.07 18.34,73.81 17.07,73.81 16.05,72.8 R14.2
N$9
  Bottom 0.254: R16.2 15.63,62.38 Q4.2
N$10
  Bottom 0.152: R17.2 16.47,70.26 15.54,70.26 15.03,69.75 15.03,67.21 15.8,66.45 Q2.5
N$11
  Bottom 0.152: J1.B5 9.33,76.66 8.98,76.66 8.18,77.47 8.18,79.91 9.19,80.93 10.21,80.93 10.46,81.18 10.46,83.21 9.7,83.97 R8.1
N$12
  Bottom 0.152: Q2.2 18.34,66.45 17.93,66.85 17.93,68.5 R18.2
N$13
  Bottom 0.254: 13.76,63.65 R10.2 | 13.76,63.65 R16.1 | Q4.3 15.65,63.03 15.03,63.65 13.76,63.65
N$14
  Bottom 0.152: Q4.5 17.83,62.38 17.57,62.64 17.57,63.57 R11.2
N$15  (via drill 0.35)
  Top 0.152: v15.8,67.72 15.8,66.19 v15.03,65.43
  Bottom 0.152: Q2.6 16.03,67.72 v15.8,67.72 | v15.03,65.43 16.05,64.42 R11.1
N$16  (via drill 0.35)
  Top 0.152: v9.48,62.6 20.08,73.21 20.52,73.21 20.97,73.66 21.71,73.66 v22.14,74.1
  Bottom 0.152: v22.14,74.1 23.71,72.53 23.71,71.2 G2.+
  Bottom 0.254: ON.P$2 5.79,54.41 9.45,58.07 9.45,62.57 v9.48,62.6
N$17
  Bottom 0.152: R23.1 35.54,51.02 36.94,49.62 D4.CATHODE
N$18
  Bottom 0.152: R15.2 28.41,62.73 28.75,62.38 30.78,62.38 31.04,62.64 31.04,65.04 D26.A
N$19
  Bottom 0.152: R24.1 42.49,54.65 42.49,49.38 43.92,47.95 D5.CATHODE
N$20
  Bottom 0.152: 50.37,45.21 D6.CATHODE | D6.CATHODE 50.65,44.97 | R25.1 48.28,45.59 48.82,45.05 D6.CATHODE
N$21  (via drill 0.35)
  other vias: 45.51,79.15
N$26
  Bottom 0.152: R9.1 52.45,87.02 Q3.1
N$33  (via drill 0.35)
  other vias: 44.24,72.04
N$34  (via drill 0.35)
  other vias: 35.97,95.78
RTS  (via drill 0.35)
  Top 0.152: v17.32,72.8 18.18,72.8 19.41,74.03 19.41,74.83 19.76,75.18 21.48,75.18 v23.42,77.12
  Bottom 0.152: Q2.4 17.18,65.8 17.57,66.19 17.57,67.21 16.72,68.06 R18.1 | v23.42,77.12 24.47,77.12 25.13,77.78 | v17.32,72.8 17.57,72.54 17.57,69.75 16.81,68.99
  Bottom 0.254: U4.2 25.65,77.78 25.13,77.78 | R18.1 16.81,68.99
T_Q1  (via drill 0.35)
  Top 0.152: v41.45,90.32 56.94,74.83 56.94,22.81 55.88,21.74 55.88,17.12 45.26,6.5 23.42,6.5 19.86,10.06 19.86,16.66
  Bottom 0.152: U2.20 40.78,90.99 v41.45,90.32
  pour Top: 10434 corners
T_Q2  (via drill 0.35)
  Top 0.152: v55.17,37.24 55.17,28.09 54.91,27.84 | v58.21,37.24 58.21,76.26 v42.23,92.25
  Bottom 0.152: U2.18 41.65,91.79 42.11,92.25 v42.23,92.25 | v58.21,37.24 v55.17,37.24
  pour Top: 10433 corners
T_Q3  (via drill 0.35)
  Top 0.152: v57.96,78.13 43.24,92.86 41.55,92.86 v41.46,92.76 | v54.91,75.08 54.91,65.23 46.17,56.49 37.34,56.49 34.34,53.49 34.34,46.89
  Bottom 0.152: U2.17 40.78,92.19 41.35,92.76 v41.46,92.76 | v54.91,75.08 v57.96,78.13
  pour Top: 10432 corners
T_Q4  (via drill 0.35)
  Top 0.152: v40.69,93.37 45.26,93.37 v57.45,81.18 | v53.64,75.08 53.64,64.54 46.4,57.3 44.53,57.3 v44.33,57.1 | v35.86,48.41 35.71,48.57 35.71,54.1 37.64,56.03 v48.77,56.03
  Bottom 0.152: U2.16 39.91,92.59 v40.69,93.37 | v57.45,81.18 53.64,77.37 v53.64,75.08 | B1.BUTTON v35.86,48.41 | v48.77,56.03 48.6,56.03 48.53,56.1 45.33,56.1 v44.33,57.1
TRACE_ANT
  Bottom 0.406: E1.ANT 24.68,99.37 C8.2
U0RXD
  Bottom 0.152: U2.40 31.84,90.54 31.34,90.54 27.73,86.93 27.73,78.54 28.97,77.31 U4.20
U0TXD
  Bottom 0.152: U2.41 31.84,90.94 31.31,90.94 27.43,87.06 27.43,80.37 26.27,79.21 U4.4
V_BATT
  Bottom 0.254: ON.P$1 3.73,51.46 9.18,51.46 14.93,57.2 18.74,57.2 Q1.3
V_USB  (via drill 0.35)
  Top 0.152: v24.94,76.35 26.21,76.35 28.65,78.79 28.65,79.65 28.83,79.83 v28.83,80.34 | v20.27,74.32 20.37,74.32 20.88,74.83 22.86,74.83 v23.3,75.27
  Top 0.254: v20.27,74.32 8.43,62.48 8.43,61.11 10.21,59.34 v15.54,59.34
  Bottom 0.152: U4.15 31.14,80.52 30.76,80.52 30.58,80.34 v28.83,80.34 | 18.91,60.34 Q1.1 | v24.94,76.35 23.85,75.27 v23.3,75.27
  Bottom 0.254: C15.1 C14.1 15.67,81.14 F1.2 16.2,78.39 v20.27,74.32 | D25.A 22,59.34 19.99,59.34 Q1.1 17.81,60.42 R12.2 16.39,60.19 v15.54,59.34
VIN
  Bottom 0.152: 22.53,62 IC1.8 22.53,63.27 23.42,64.16 25.96,64.16 26.34,63.78 IC1.5
  Bottom 0.254: IC1.8 20.81,60.76 Q1.2 23.08,60.42 D25.C C29.1
VUSB-RAW  (via drill 0.35)
  Top 0.254: v10.21,72.54 10.21,75.34 v11.22,76.35
  Bottom 0.152: 10.11,72.45 v10.21,72.54 | v11.22,76.35 11.22,76.61
  Bottom 0.254: J1.B4A9 11.72,77.13 11.73,77.12 | 12.94,78.32 11.73,77.12 | 12.94,78.32 F1.1 | C11.1 14.78,80.16 12.94,78.32 | J1.A4B9 10.11,72.45 | 11.22,76.61 11.73,77.12